# Altium PCB top_pcb_4layers_positive.PcbDoc (part 1 of 2)
Units mil, origin at the board's own origin, x right, y up, seen from the top; angles counter-clockwise.
Board outline 1559.84 x 1559.84 mil, 4 copper layers (Top Layer, GND_positive, Power_positive, Bottom Layer); 135 components, 124 nets, 727 pads, 408 vias.
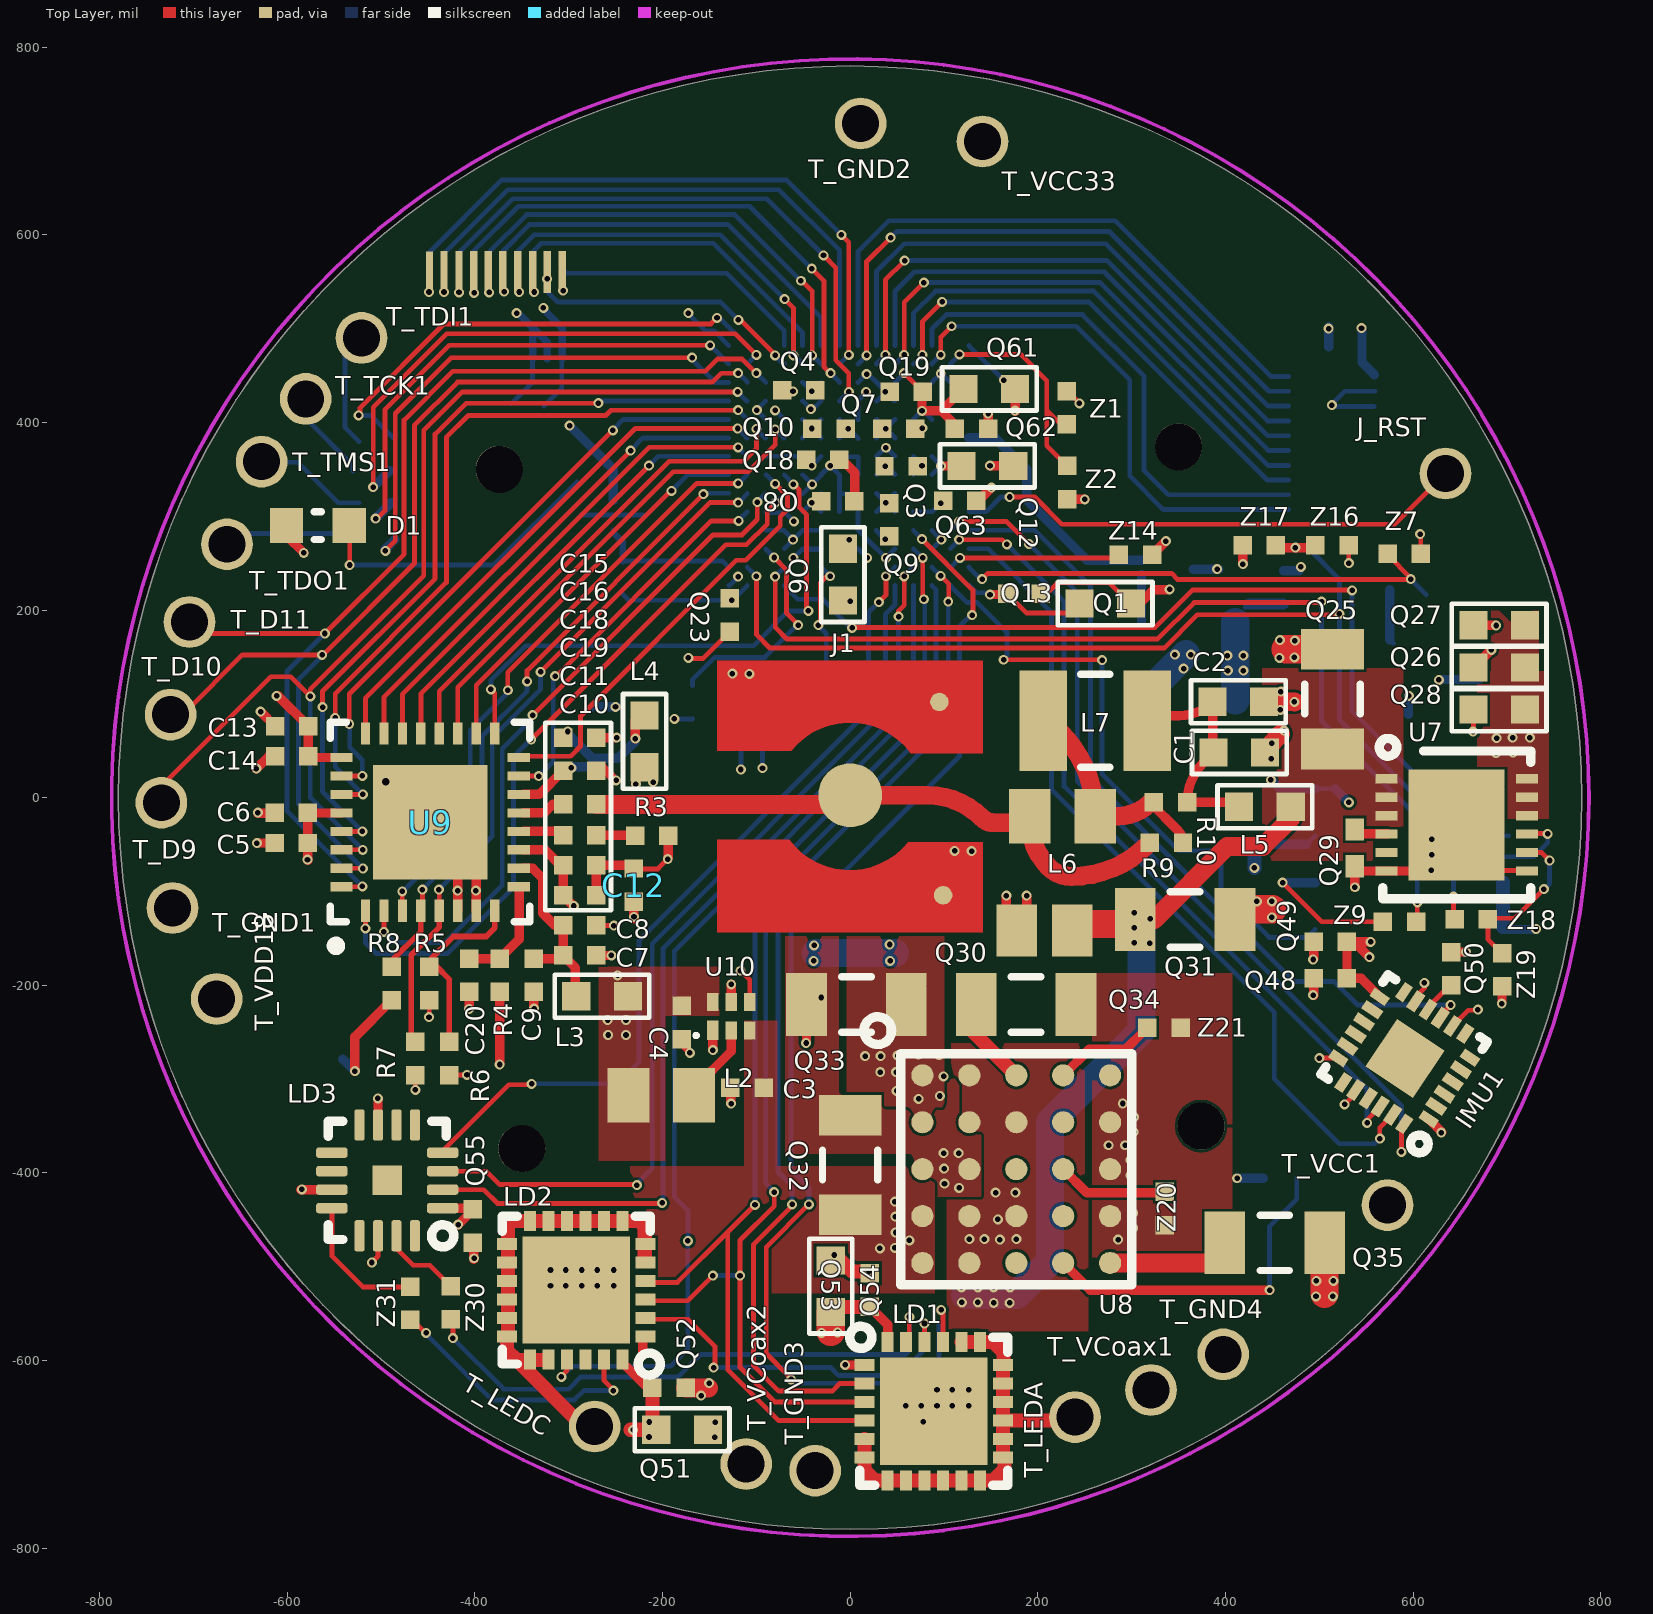
[diagram p0: Top Layer view]
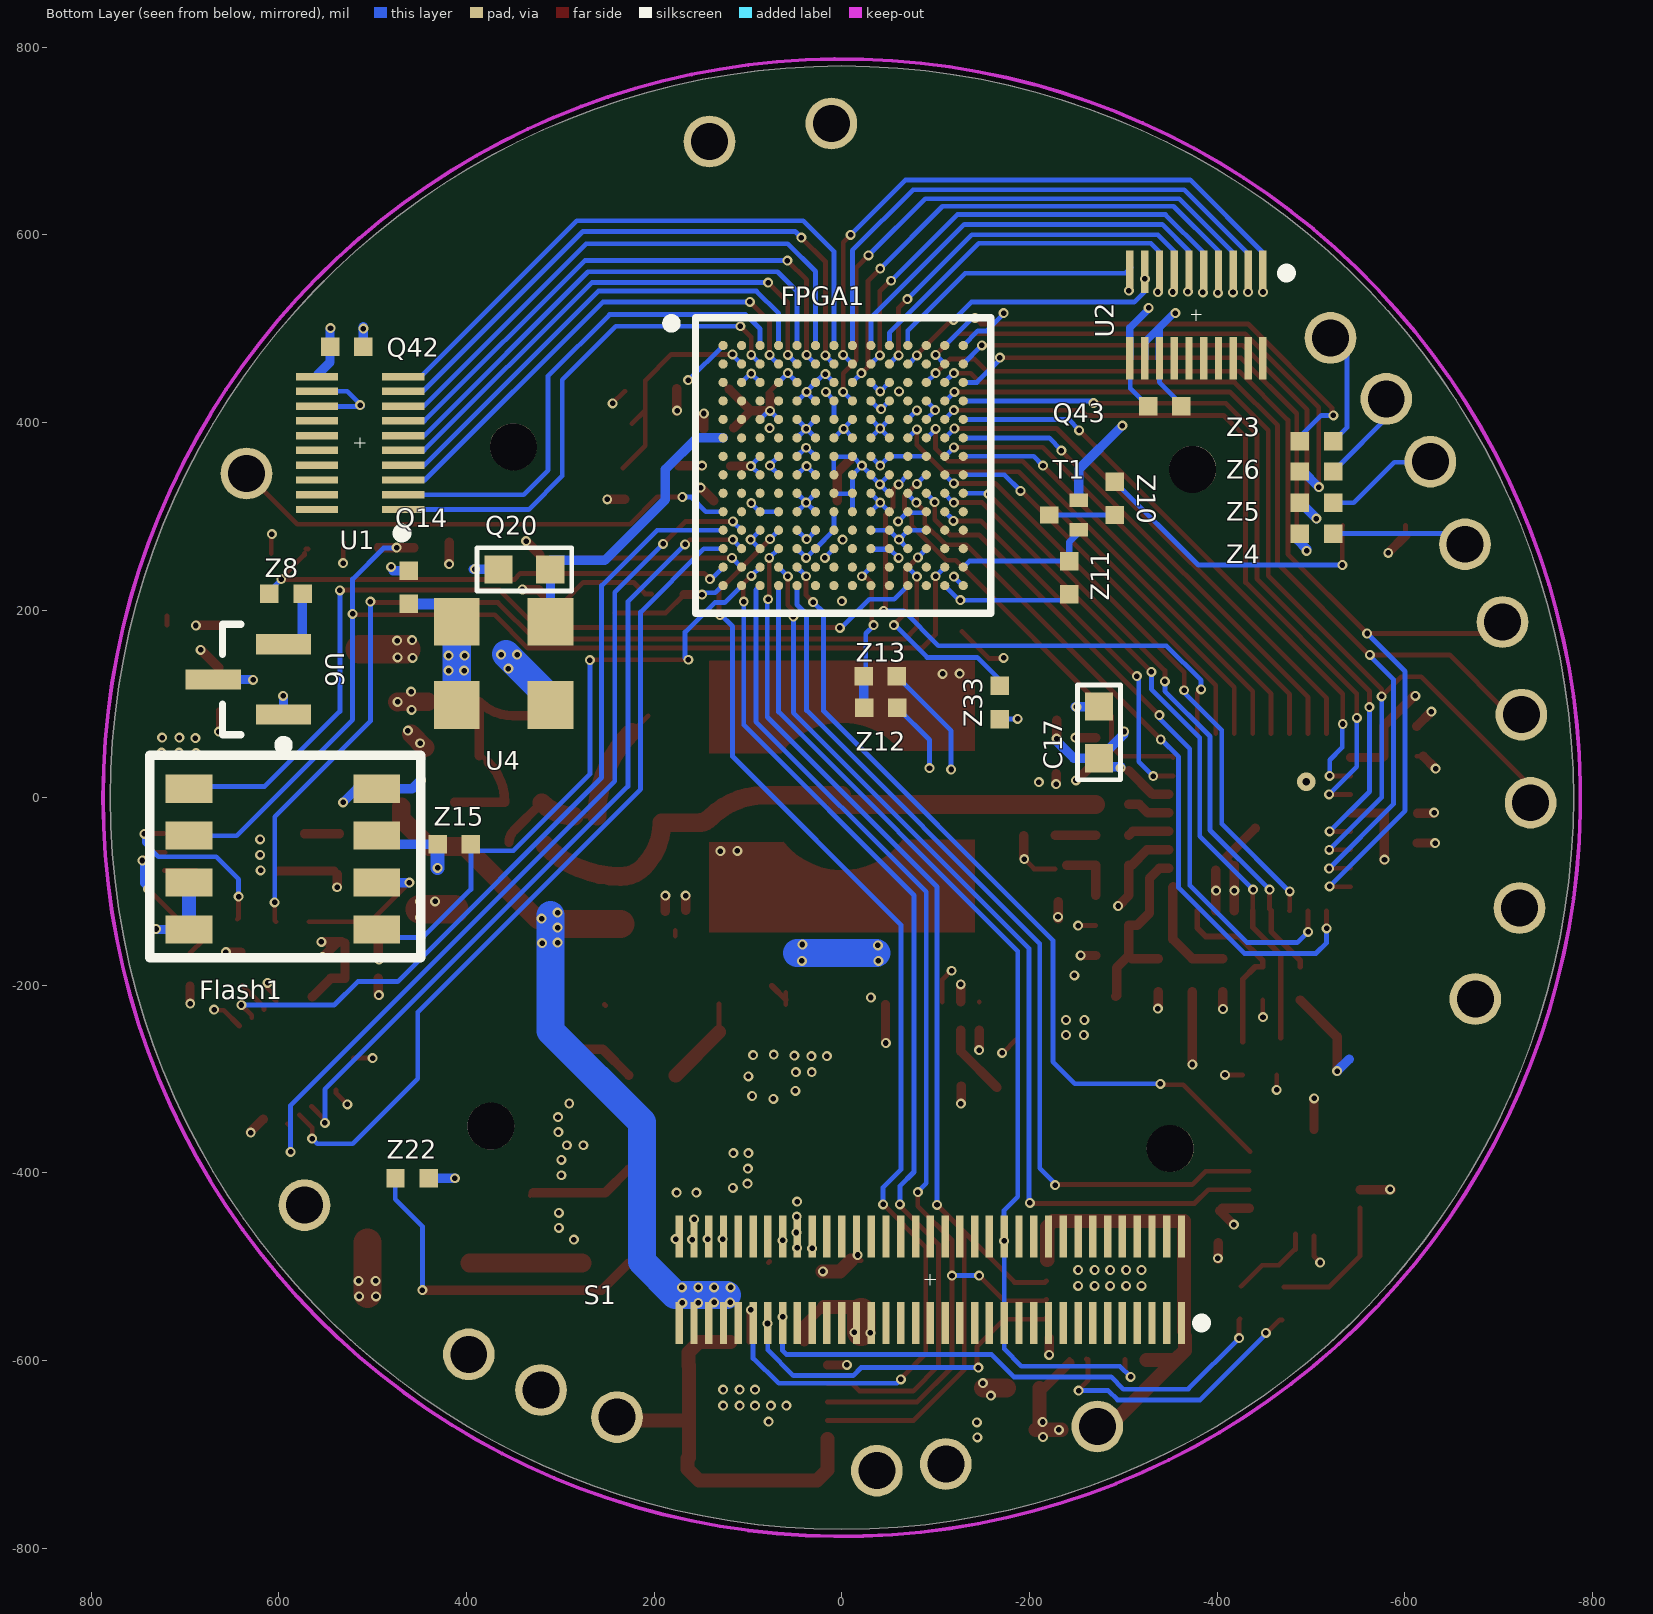
[diagram p1: Bottom Layer view, seen from below]
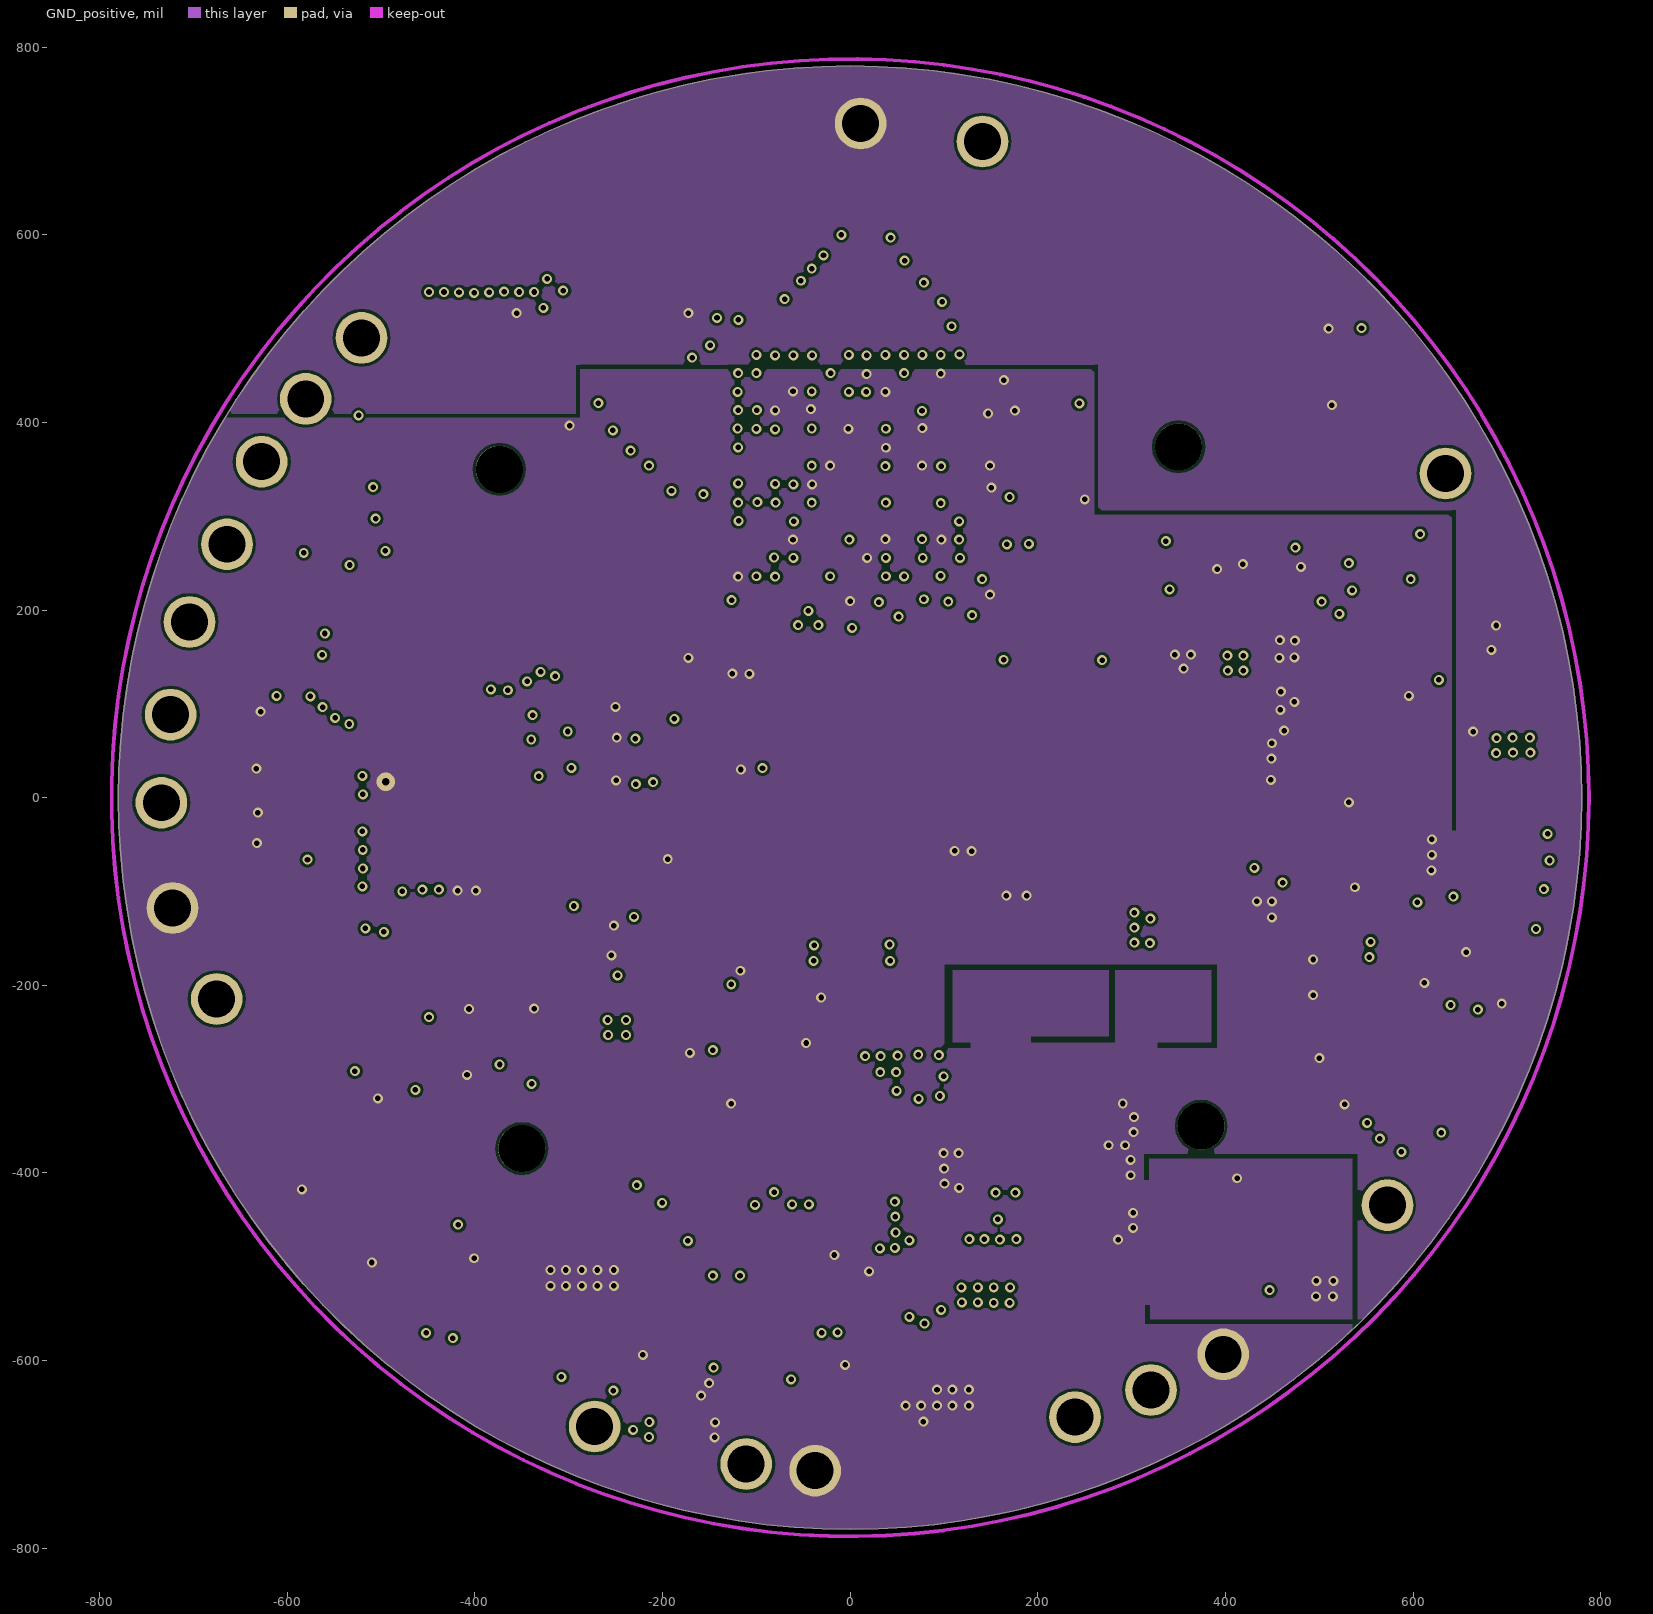
[diagram p2: GND_positive]
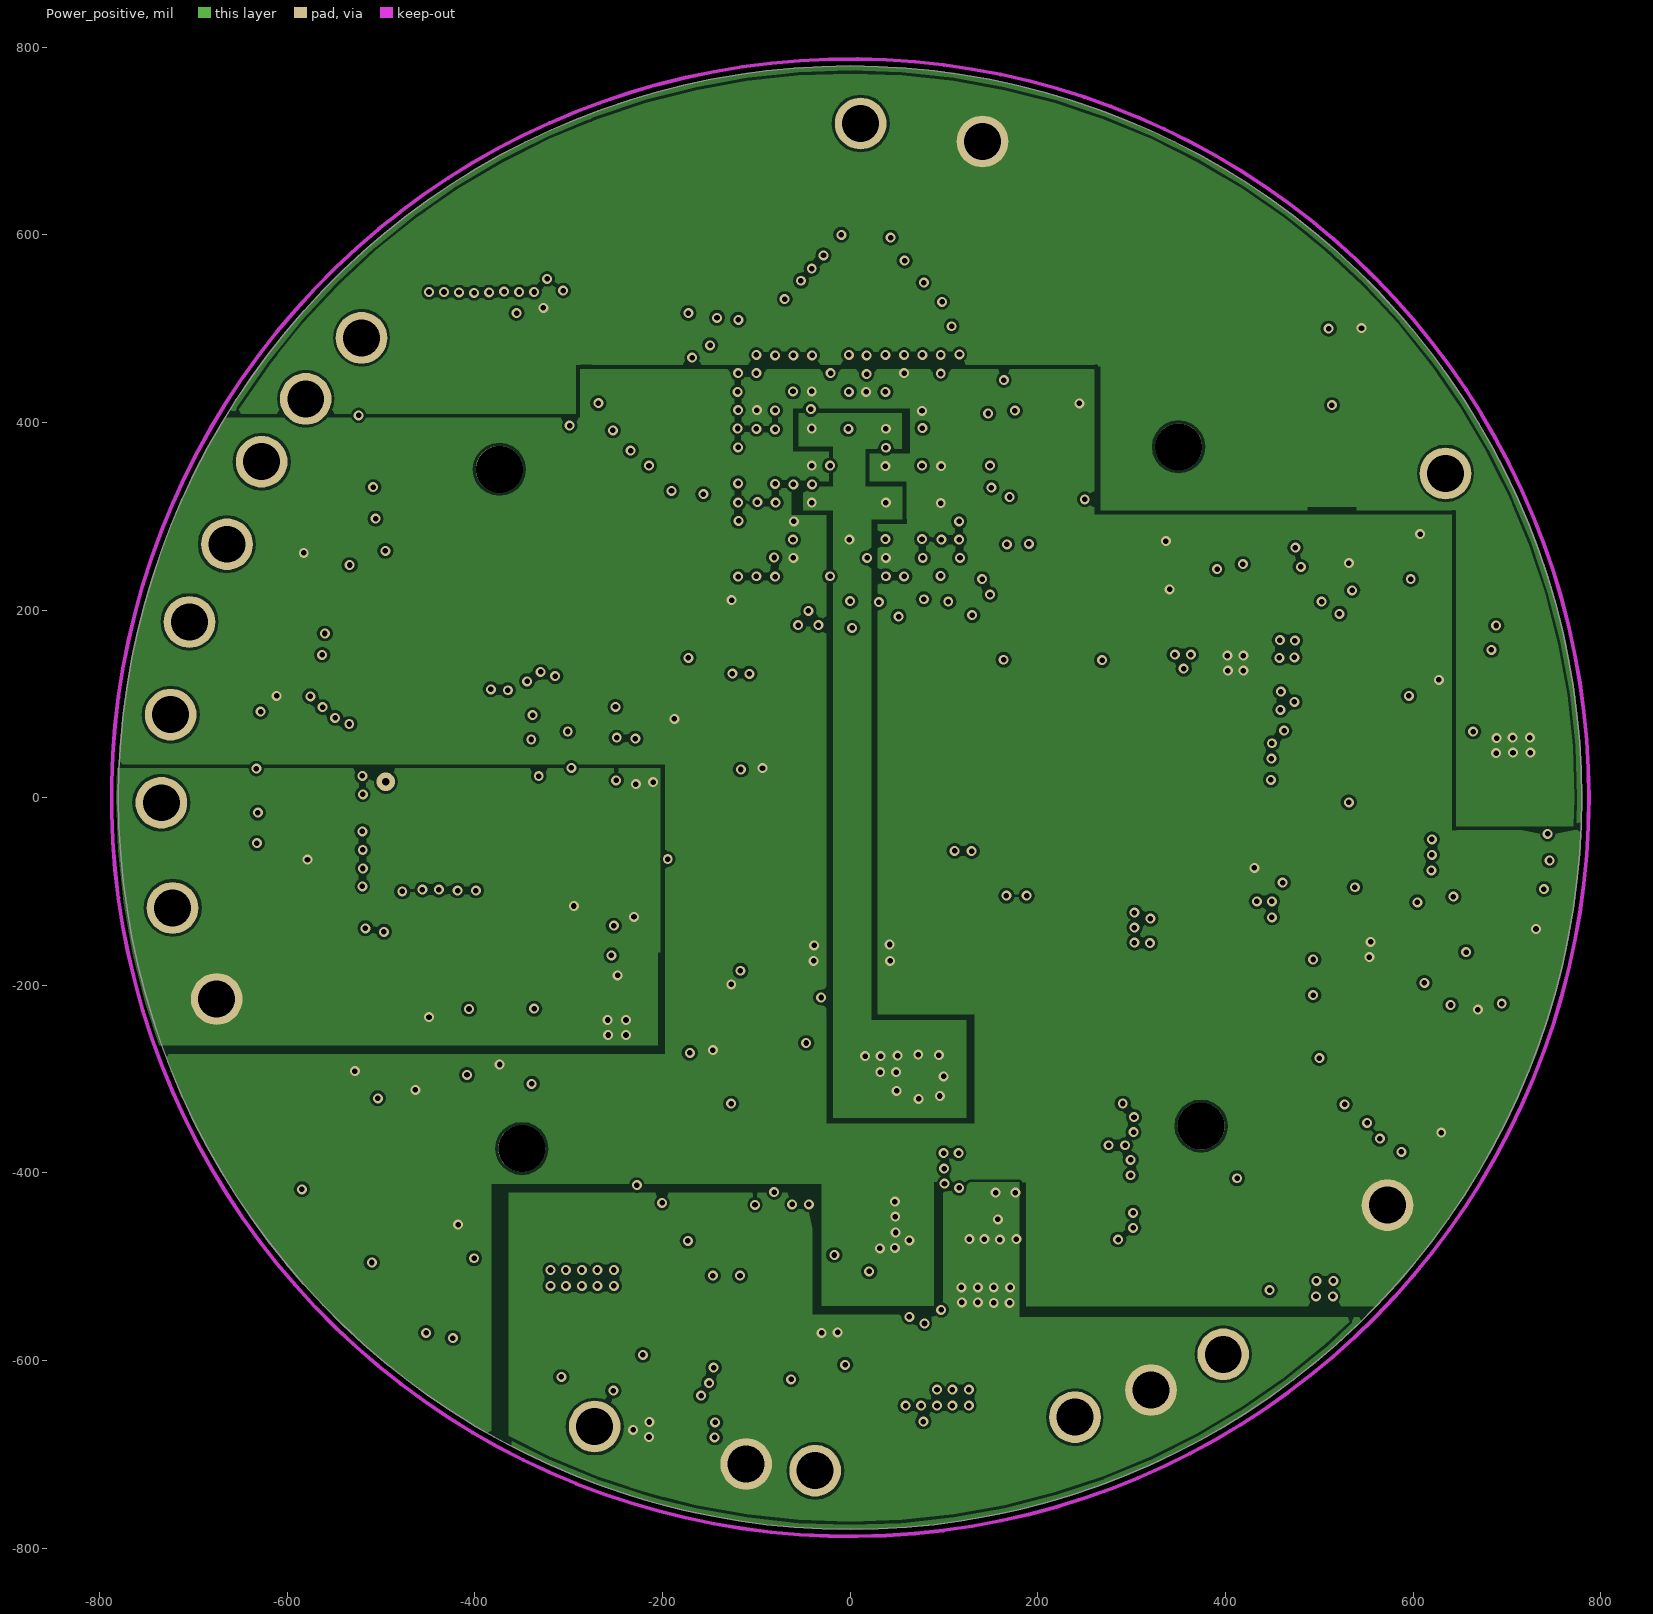
[diagram p3: Power_positive]

## Layer stack, top to bottom
Top Layer: signal copper 1.4
Dielectric: core 12.6, FR-4, Dk 4.8
GND_positive: signal copper 1.4
Dielectric: prepreg 12.6, FR-4, Dk 4.8
Power_positive: signal copper 1.4
Dielectric: core 12.6, FR-4, Dk 4.8
Bottom Layer: signal copper 1.4

## Board outline
-780.04,0 ccw(c-0.12,0) -0.12,-779.93 ccw(c-0.12,0) 779.8,0 ccw(c-0.12,0) -0.12,779.92 ccw(c-0.12,0)

## Design rules (kind name [scope] priority, off if disabled: settings)
Clearance [All] p1: gap=3
ComponentClearance [All] p1: gap=5 collisioncheckmode=3 verticalgap=10 showdistances=FALSE
HoleSize [All] p1: absolutevalues=TRUE maxlimit=255.91 minlimit=5.91 maxpercent=80.000 minpercent=20.000
MinimumAnnularRing [All] p1: minimumring=2.36
MinimumSolderMaskSliver [All] p1: minsoldermaskwidth=0
PlaneClearance [All] p1: clearance=6
PlaneConnect [All] p1: planeconnectstyle=Direct reliefexpansion=20 reliefentries=4 reliefconductorwidth=10 reliefairgap=10
PolygonConnect [All] p1: connectstyle=Direct reliefconductorwidth=10 reliefentries=4 polygonreliefangle="90 Angle" airgapwidth=10
RoutingVias [All] p1: holewidth=10 width=22 viastyle="Through Hole" minholewidth=5.91 minwidth=10.63 maxholewidth=28 maxwidth=50
SilkToSilkClearance [All] p1: silktosilkclearance=0
SilkToSolderMaskClearance [IsPad] p1: minsilkscreentomaskgap=0 clearancetoexposedcopper=FALSE
SolderMaskExpansion SolderMaskExpansion_Via [IsVia And (Not IsTestPoint)] p1: expansion=-19685.04
SolderMaskExpansion [All] p2: expansion=1
Width [All] p1: maxlimit=100 minlimit=3 preferedwidth=10 toplayer_prefwidth=5.12 midlayer1_minwidth=5 midlayer2_minwidth=5 bottomlayer_prefwidth=5.12 minimp=50.000000 maximp=50.000000 favimp=50.000000
21 further rules are at their usual default settings.

## Classes and differential pairs
component class U_led-driver: LD1 LD2 LD3 Q51 Q52 Q53 Q54 Q55 T_GND3 T_GND4 T_LEDA T_LEDC T_VCoax1 T_VCoax2 Z30 Z31
component class U_imu: IMU1 Q48 Q49 Q50
component class U_coaxial-port: C1 C2 J1 L5 L6 L7 R9 R10
component class U_Headstage_withFPGA_BGA: D1 Flash1 FPGA1 J_RST Q1 Q3 Q4 Q6 Q7 Q8 Q9 Q10 Q12 Q13 Q14 Q18 Q19 Q20 Q23 Q42 Q43 Q61 Q62 Q63 S1 T1 T_D9 T_D10 T_D11 T_GND1 T_GND2 T_TCK1 T_TDI1 T_TDO1 T_TMS1 T_VCC1 T_VDD18 U1 U2 U4 U6 Z1 Z2 Z3 Z4 Z5 Z6 Z7 Z8 Z9 Z10 Z11 Z12 Z13 Z14 Z15 Z16 Z17 Z33
component class U_power-supplies: C3 C4 L2 Q25 Q26 Q27 Q28 Q29 Q30 Q31 Q32 Q33 Q34 Q35 T_VCC33 U7 U8 U10 Z18 Z19 Z20 Z21 Z22
component class U_serial-io: C5 C6 C7 C8 C9 C10 C11 C12 C13 C14 C15 C16 C17 C18 C19 C20 L3 L4 R3 R4 R5 R6 R7 R8 U9
net class DIN[0..11]: DIN0 DIN1 DIN2 DIN3 DIN4 DIN5 DIN6 DIN7 DIN8 DIN9 DIN10 DIN11

## Components (designator, comment, footprint, x,y, rotation, side; value= is the part's Value field where it differs from the comment)
C1 "X7R Ceramic" Cap-0603 415.5,46.5 r180 top (schematic designator C14)
C2 "X7R Ceramic" Cap-0603 414.5,100.5 r180 top (schematic designator C15)
C3 "X7R Ceramic" Cap_0402 -115.68,-307.59 r180 top (schematic designator C6)
C4 "X7R Ceramic" Cap_0402 -181.22,-245.38 r270 top (schematic designator C7)
C5 "X7R Ceramic" Cap_0402 -601.5,-46.5 r180 top (schematic designator C43)
C6 "X7R Ceramic" Cap_0402 -601.5,-14.5 r180 top (schematic designator C44)
C7 "X7R Ceramic" Cap_0402 -282.54,-170 r0 top (schematic designator C45)
C8 "X7R Ceramic" Cap_0402 -282.54,-138 r0 top (schematic designator C46)
C9 "X7R Ceramic" Cap_0402 -339,-195 r270 top (schematic designator C47)
C10 "X7R Ceramic" Cap_0402 -282.54,-106 r0 top (schematic designator C48)
C11 "X7R Ceramic" Cap_0402 -282.54,-74 r0 top (schematic designator C49)
C12 "X7R Ceramic" Cap_0402 -229,-87.5 r90 top (schematic designator C50)
C13 "X7R Ceramic" Cap_0402 -601,78 r180 top (schematic designator C51)
C14 "X7R Ceramic" Cap_0402 -601,46 r180 top (schematic designator C52)
C15 "X7R Ceramic" Cap_0402 -282.54,62 r0 top (schematic designator C53)
C16 "X7R Ceramic" Cap_0402 -282.54,27 r0 top (schematic designator C54)
C17 "X7R Ceramic" Cap-0603 -275.88,70.32 r270 bottom (schematic designator C55)
C18 "X7R Ceramic" Cap_0402 -282.54,-9 r0 top (schematic designator C56)
C19 "X7R Ceramic" Cap_0402 -282.54,-42 r0 top (schematic designator C57)
C20 "X7R Ceramic" Cap_0402 -408,-195 r270 top (schematic designator C58)
D1 "GREEN" RES_0603 -567.5,290 r0 top
Flash1 "M25P16" M25P16-S08N 493,-139.5 r90 bottom
FPGA1 "XC6SLX16-2CPG196C" CPG196 -1.5,354 r180 bottom locked
IMU1 "MPU90250" QFN24-3x3mm 590.5,-277.5 r146 top
J1 "Coax Connector" SMA_132134-10-ND 0,0 r270 top locked
J_RST "Header_1PIN" JUMPER1PIN 678.5,290.5 r90 top (schematic designator J_RST1)
L2 "Ferrite Bead" LQM21PN2R2MC0D -210.36,-320.42 r0 top (schematic designator L1)
L3 "Ferrite Bead" BLM18KG601SN1D -288,-218 r0 top (schematic designator L5)
L4 "Ferrite Bead" BLM18KG601SN1D -212.93,36.5 r90 top (schematic designator L6)
L5 "Ferrite Bead" BLM18KG601SN1D 465.5,-3.5 r180 top (schematic designator L2)
L6 "Ferrite Bead" CIG21L4R7MNE 227,-17.5 r0 top (schematic designator L3)
L7 "Ferrite Bead" CBC3225T101MR 259.5,82 r180 top (schematic designator L4)
LD1 "CAT4016" TQFN24-4x4mm 90,-654 r0 top locked
LD2 "CAT4016" TQFN24-4x4mm -293,-525 r180 top (schematic designator LD3)
LD3 "TPL0202-10RUCR" WQFN16-3X3mm -493.5,-408 r180 top locked (schematic designator LD2)
Q1 "X7R Ceramic" Cap-0603 271,208.5 r0 top
Q3 "X7R Ceramic" Cap_0402 60,351.5 r0 top
Q4 "X7R Ceramic" Cap_0402 -60.5,436 r180 top
Q6 "X7R Ceramic" Cap-0603 -9.5,237 r90 top
Q7 "X7R Ceramic" Cap_0402 57.5,391.5 r0 top
Q8 "X7R Ceramic" Cap_0402 -7.5,314 r0 top
Q9 "X7R Ceramic" Cap_0402 40,290.5 r270 top
Q10 "X7R Ceramic" Cap_0402 -17,391.5 r0 top
Q12 "X7R Ceramic" Cap-0603 147,352 r180 top
Q13 "X7R Ceramic" Cap_0402 179.5,219 r180 top
Q14 "X7R Ceramic" Cap_0402 460,230 r90 bottom
Q18 "X7R Ceramic" Cap_0402 -23.5,358.5 r0 top
Q19 "X7R Ceramic" Cap_0402 54,434.5 r180 top
Q20 "X7R Ceramic" Cap-0603 339,245 r180 bottom
Q23 "X7R Ceramic" Cap_0402 -130,189 r270 top
Q25 "25V" C1206 514,105 r270 top (schematic designator C1)
Q26 "Cap Semi" Cap-0603 691,140.5 r0 top (schematic designator C2)
Q27 "Cap Semi" Cap-0603 691,185.5 r0 top (schematic designator C3)
Q28 "Cap Semi" Cap-0603 691,95.5 r0 top (schematic designator C4)
Q29 "" 0402 538,-53.5 r90 top (schematic designator C5)
Q30 "25V, DNP" C0805 207,-141.5 r0 top (schematic designator C8)
Q31 "25V" C1206 357,-130 r180 top (schematic designator C9)
Q32 "16V" C1206 0,-391.5 r270 top (schematic designator C10)
Q33 "16V" C1206 6.5,-220.5 r0 top (schematic designator C11)
Q34 "25V" C1206 187.5,-220.5 r180 top (schematic designator C12)
Q35 "25V" C1206 452.5,-474.5 r180 top (schematic designator C13)
Q42 "X7R Ceramic" Cap_0402 533.5,482.5 r0 bottom (schematic designator C28)
Q43 "X7R Ceramic" Cap_0402 -338.5,419 r0 bottom
Q48 "Cap" Cap_0402 517.5,-194.5 r0 top
Q49 "Cap" Cap_0402 517.5,-155.5 r0 top
Q50 "Cap" Cap_0402 639,-188 r270 top
Q51 "Cap" Cap-0603 -178.5,-675.5 r180 top (schematic designator C38)
Q52 "Cap" Cap_0402 -187.5,-631 r0 top (schematic designator C39)
Q53 "Cap" Cap-0603 -19,-520 r270 top (schematic designator C41)
Q54 "Cap" Cap_0402 22.5,-519 r90 top (schematic designator C42)
Q55 "Cap" Cap_0402 -400.57,-450.9 r90 top (schematic designator C40)
Q61 "X7R Ceramic" Cap-0603 149,434 r180 top (schematic designator C18)
Q62 "X7R Ceramic" Cap_0402 135,391.5 r0 top (schematic designator C17)
Q63 "X7R Ceramic" Cap_0402 122.5,314.5 r0 top (schematic designator C16)
R3 "Res1" Res_0402 -211.5,-40 r180 top (schematic designator R28)
R4 "Res1" Res_0402 -373,-189.27 r90 top (schematic designator R29)
R5 "Res1" Res_0402 -448,-198 r90 top (schematic designator R30)
R6 "Res1" Res_0402 -428,-278 r270 top (schematic designator R31)
R7 "Res1" Res_0402 -463,-278 r90 top (schematic designator R32)
R8 "Res1" Res_0402 -488,-198 r90 top (schematic designator R33)
R9 "Res1" Res_0402 337,-48.5 r0 top (schematic designator R6)
R10 "Res1" Res_0402 341.5,-5.5 r0 top (schematic designator R7)
S1 "Hirose-DF40-70pins" "DF40 - 70" -94.41,-514 r0 bottom locked
T1 "DTC143EE" VMT3 -257,289 r90 bottom
T_D9 "Header_1PIN" JUMPER1PIN -690.38,-60.54 r90 top
T_D10 "Header_1PIN" JUMPER1PIN -680.51,33.37 r90 top
T_D11 "Header_1PIN" JUMPER1PIN -660.41,132.21 r90 top
T_GND1 "Header_1PIN" JUMPER1PIN -678.41,-172.63 r90 top
T_GND2 "Header_1PIN" JUMPER1PIN 55,663.5 r90 top
T_GND3 "Header_1PIN" JUMPER1PIN 6.5,-772.5 r90 top
T_GND4 "Header_1PIN" JUMPER1PIN 441.5,-648.5 r90 top
T_LEDA "Header_1PIN" JUMPER1PIN 283.5,-715.5 r90 top (schematic designator T_LEDA1)
T_LEDC "Header_1PIN" JUMPER1PIN -228.5,-725.5 r90 top (schematic designator T_LEDC1)
T_TCK1 "Header_1PIN" JUMPER1PIN -536.5,370 r90 top
T_TDI1 "Header_1PIN" JUMPER1PIN -477,435 r90 top
T_TDO1 "Header_1PIN" JUMPER1PIN -620.5,215 r90 top
T_TMS1 "Header_1PIN" JUMPER1PIN -583.5,303 r90 top
T_VCC1 "Header_1PIN" JUMPER1PIN 616.5,-489.5 r90 top
T_VCC33 "Header_1PIN" JUMPER1PIN 184.83,644.33 r90 top
T_VCoax1 "Header_1PIN" JUMPER1PIN 364.5,-686.5 r90 top
T_VCoax2 "Header_1PIN" JUMPER1PIN -67,-765.5 r90 top
T_VDD18 "Header_1PIN" JUMPER1PIN -631.38,-269.69 r90 top
U1 "Hirose-DF40C" DF40 513.5,378 r90 bottom locked
U2 "Hirose-DF40C" DF40 -378,514.5 r0 bottom locked
U4 "FXO-HC53100.8" FXO-HC53 410.5,99 r180 bottom
U6 "LM809M3-3.08" SOT23 632.5,126 r0 bottom locked
U7 "LP38798" DFN12 646.5,-29 r0 top (schematic designator U1)
U8 "LTM4622" LGA5x5 177,-396 r0 top locked (schematic designator U3)
U9 "DS90UR913A" WQFN32-DS90UB913A -443,-18 r90 top locked (schematic designator U8)
U10 "TPS62231DRYT" TPS62231DRYT -128.02,-234.11 r0 top (schematic designator U2)
Z1 "Res1" Res_0402 230.19,415.55 r270 top
Z2 "Res1" Res_0402 230.43,336 r270 top
Z3 "Res1" Res_0402 -506,379 r180 bottom
Z4 "Res1" Res_0402 -506,280.5 r180 bottom
Z5 "Res1" Res_0402 -506.06,313.59 r180 bottom
Z6 "Res1" Res_0402 -506,347 r180 bottom
Z7 "Res1" Res_0402 590.51,259.5 r0 top
Z8 "Res1" Res_0402 592.5,218 r0 bottom
Z9 "Res1" Res_0402 585.5,-131.5 r180 top
Z10 "Res1" Res_0402 -290.5,319 r270 bottom
Z11 "Res1" Res_0402 -243,234.5 r90 bottom
Z12 "Res1" Res_0402 -41.5,96.5 r0 bottom (schematic designator R13)
Z13 "Res1" Res_0402 -41,128.5 r180 bottom (schematic designator R16)
Z14 "Res1" Res_0402 304,258 r0 top
Z15 "Res1" Res_0402 413,-50.5 r180 bottom
Z16 "Res1" Res_0402 513.5,269.5 r180 top
Z17 "Res1" Res_0402 436,269.5 r180 top
Z18 "Res1" Res_0402 662,-129 r180 top (schematic designator R1)
Z19 "Res1" Res_0402 695.5,-183.5 r90 top (schematic designator R2)
Z20 "DNP" Res_0402 336,-438 r90 top (schematic designator R3)
Z21 "649k (DNP)" Res_0402 334.5,-244.5 r180 top (schematic designator R4)
Z22 "" Res_0402 458,-405 r0 bottom (schematic designator R5)
Z30 "Res1" Res_0402 -425,-538.5 r90 top (schematic designator R26)
Z31 "Res1" Res_0402 -468.5,-539 r90 top (schematic designator R27)
Z33 "Res1" Res_0402 -167.5,101.5 r270 bottom (schematic designator R14)

## Footprints (in the part's own frame and the unit in brackets; to place one, negate y for a bottom-side part, rotate by r counter-clockwise, add the part's x,y. Pads: shape width x height; smd on the part's side, far side on the other; paste and mask are expansions set on the pad)
0402 [mm] "Chip Capacitor, Body 1.0x0.5mm, IPC High Density"
  rect 0.6x0.5 smd: 1(-0.5,0) 2(0.5,0)
  body extent -0.55,-0.3 0.55,0.3, height 1.3
BLM18KG601SN1D [mil]
  rect 30x30 smd: 1(50.93,6.25) 2(-4.07,6.25)
  silkscreen extent -27,-17 74,29, body extent -8,-9 55,21, height 19
C0805 [mm] "Chip Capacitor, Body 2.0x1.3mm, IPC High Density"
  rect 1.1x1.4 smd: 1(-0.75,0) 2(0.75,0)
  body extent -1.1,-0.72 1.1,0.72, height 1.4
C1206 [mm] "Chip Capacitor, Body 3.2x1.6mm, IPC High Density"
  rect 1.1x1.7 smd: 1(-1.35,0) 2(1.35,0)
  silkscreen extent -0.4,-0.75 0.4,0.75, body extent -1.7,-0.9 1.7,0.9, height 1.3
Cap-0603 [mil] "0603 Capacitor"
  rect 30x30 smd: 1(-26.74,-1.7) 2(28.26,-1.7)
  silkscreen extent -50,-25 51,21, body extent -31,-17 32,13, height 19
Cap_0402 [mm]
  rect 0.5x0.5 smd: 1(0.305,0.046) 2(-0.595,0.046)
  body extent -0.67,-0.23 0.38,0.32, height 0.5
CBC3225T101MR [mm]
  rect 1.29x2.72 smd: 1(1.362,0.003) 2(-1.448,0.003)
  silkscreen extent -0.44,-1.26 0.36,1.26, body extent -1.74,-1.35 1.66,1.35, height 2.7
CIG21L4R7MNE [mm]
  rect 1.13x1.47 smd: 1(-0.905,-0.056) 2(0.865,-0.056)
  body extent -1.12,-0.78 1.08,0.67, height 1.05
CPG196 [mm] "BGA, 196-Leads, Body 8x8mm, Pitch 0.5mm"
  round 0.25 smd: A1(-3.25,3.25) A2(-2.75,3.25) A3(-2.25,3.25) A4(-1.75,3.25) A5(-1.25,3.25) A6(-0.75,3.25) A7(-0.25,3.25) A8(0.25,3.25) A9(0.75,3.25) A10(1.25,3.25) A11(1.75,3.25) A12(2.25,3.25) A13(2.75,3.25) A14(3.25,3.25) B1(-3.25,2.75) B2(-2.75,2.75) B3(-2.25,2.75) B4(-1.75,2.75) B5(-1.25,2.75) B6(-0.75,2.75) B7(-0.25,2.75) B8(0.25,2.75) B9(0.75,2.75) B10(1.25,2.75) B11(1.75,2.75) B12(2.25,2.75) B13(2.75,2.75) B14(3.25,2.75) C1(-3.25,2.25) C2(-2.75,2.25) C3(-2.25,2.25) C4(-1.75,2.25) C5(-1.25,2.25) C6(-0.75,2.25) C7(-0.25,2.25) C8(0.25,2.25) C9(0.75,2.25) C10(1.25,2.25) C11(1.75,2.25) C12(2.25,2.25) C13(2.75,2.25) C14(3.25,2.25) D1(-3.25,1.75) D2(-2.75,1.75) D3(-2.25,1.75) D4(-1.75,1.75) D5(-1.25,1.75) D6(-0.75,1.75) D7(-0.25,1.75) D8(0.25,1.75) D9(0.75,1.75) D10(1.25,1.75) D11(1.75,1.75) D12(2.25,1.75) D13(2.75,1.75) D14(3.25,1.75) E1(-3.25,1.25) E2(-2.75,1.25) E3(-2.25,1.25) E4(-1.75,1.25) E5(-1.25,1.25) E6(-0.75,1.25) E7(-0.25,1.25) E8(0.25,1.25) E9(0.75,1.25) E10(1.25,1.25) E11(1.75,1.25) E12(2.25,1.25) E13(2.75,1.25) E14(3.25,1.25) F1(-3.25,0.75) F2(-2.75,0.75) F3(-2.25,0.75) F4(-1.75,0.75) F5(-1.25,0.75) F6(-0.75,0.75) F7(-0.25,0.75) F8(0.25,0.75) F9(0.75,0.75) F10(1.25,0.75) F11(1.75,0.75) F12(2.25,0.75) F13(2.75,0.75) F14(3.25,0.75) G1(-3.25,0.25) G2(-2.75,0.25) G3(-2.25,0.25) G4(-1.75,0.25) G5(-1.25,0.25) G6(-0.75,0.25) G7(-0.25,0.25) G8(0.25,0.25) G9(0.75,0.25) G10(1.25,0.25) G11(1.75,0.25) G12(2.25,0.25) G13(2.75,0.25) G14(3.25,0.25) H1(-3.25,-0.25) H2(-2.75,-0.25) H3(-2.25,-0.25) H4(-1.75,-0.25) H5(-1.25,-0.25) H6(-0.75,-0.25) H7(-0.25,-0.25) H8(0.25,-0.25) H9(0.75,-0.25) H10(1.25,-0.25) H11(1.75,-0.25) H12(2.25,-0.25) H13(2.75,-0.25) H14(3.25,-0.25) J1(-3.25,-0.75) J2(-2.75,-0.75) J3(-2.25,-0.75) J4(-1.75,-0.75) J5(-1.25,-0.75) J6(-0.75,-0.75) J7(-0.25,-0.75) J8(0.25,-0.75) J9(0.75,-0.75) J10(1.25,-0.75) J11(1.75,-0.75) J12(2.25,-0.75) J13(2.75,-0.75) J14(3.25,-0.75) K1(-3.25,-1.25) K2(-2.75,-1.25) K3(-2.25,-1.25) K4(-1.75,-1.25) K5(-1.25,-1.25) K6(-0.75,-1.25) K7(-0.25,-1.25) K8(0.25,-1.25) K9(0.75,-1.25) K10(1.25,-1.25) K11(1.75,-1.25) K12(2.25,-1.25) K13(2.75,-1.25) K14(3.25,-1.25) L1(-3.25,-1.75) L2(-2.75,-1.75) L3(-2.25,-1.75) L4(-1.75,-1.75) L5(-1.25,-1.75) L6(-0.75,-1.75) L7(-0.25,-1.75) L8(0.25,-1.75) L9(0.75,-1.75) L10(1.25,-1.75) L11(1.75,-1.75) L12(2.25,-1.75) L13(2.75,-1.75) L14(3.25,-1.75) M1(-3.25,-2.25) M2(-2.75,-2.25) M3(-2.25,-2.25) M4(-1.75,-2.25) M5(-1.25,-2.25) M6(-0.75,-2.25) M7(-0.25,-2.25) M8(0.25,-2.25) M9(0.75,-2.25) M10(1.25,-2.25) M11(1.75,-2.25) M12(2.25,-2.25) M13(2.75,-2.25) M14(3.25,-2.25) N1(-3.25,-2.75) N2(-2.75,-2.75) N3(-2.25,-2.75) N4(-1.75,-2.75) N5(-1.25,-2.75) N6(-0.75,-2.75) N7(-0.25,-2.75) N8(0.25,-2.75) N9(0.75,-2.75) N10(1.25,-2.75) N11(1.75,-2.75) N12(2.25,-2.75) N13(2.75,-2.75) N14(3.25,-2.75) P1(-3.25,-3.25) P2(-2.75,-3.25) P3(-2.25,-3.25) P4(-1.75,-3.25) P5(-1.25,-3.25) P6(-0.75,-3.25) P7(-0.25,-3.25) P8(0.25,-3.25) P9(0.75,-3.25) P10(1.25,-3.25) P11(1.75,-3.25) P12(2.25,-3.25) P13(2.75,-3.25) P14(3.25,-3.25)
  silkscreen extent -4.78,-4 4,4, body extent -4,-4 4,4, height 1.1
DF40 [mm]
  rect 0.2x1.14 smd mask+0.05: 1(-1.8,1.17) 2(-1.4,1.17) 3(-1,1.17) 4(-0.6,1.17) 5(-0.2,1.17) 6(0.2,1.17) 7(0.6,1.17) 8(1,1.17) 9(1.4,1.17) 10(1.8,1.17) 11(1.8,-1.17) 12(1.4,-1.17) 13(1,-1.17) 14(0.6,-1.17) 15(0.2,-1.17) 16(-0.2,-1.17) 17(-0.6,-1.17) 18(-1,-1.17) 19(-1.4,-1.17) 20(-1.8,-1.17)
  silkscreen extent -2.44,-1.13 0.14,0.15
"DF40 - 70" [mm]
  rect 0.2x1.14 smd mask+0.05: 1(-6.8,1.17) 2(-6.4,1.17) 3(-6,1.17) 4(-5.6,1.17) 5(-5.2,1.17) 6(-4.8,1.17) 7(-4.4,1.17) 8(-4,1.17) 9(-3.6,1.17) 10(-3.2,1.17) 11(-2.8,1.17) 12(-2.4,1.17) 13(-2,1.17) 14(-1.6,1.17) 15(-1.2,1.17) 16(-0.8,1.17) 17(-0.4,1.17) 18(0,1.17) 19(0.4,1.17) 20(0.8,1.17) 21(1.2,1.17) 22(1.6,1.17) 23(2,1.17) 24(2.4,1.17) 25(2.8,1.17) 26(3.2,1.17) 27(3.6,1.17) 28(4,1.17) 29(4.4,1.17) 30(4.8,1.17) 31(5.2,1.17) 32(5.6,1.17) 33(6,1.17) 34(6.4,1.17) 35(6.8,1.17) 36(6.8,-1.17) 37(6.4,-1.17) 38(6,-1.17) 39(5.6,-1.17) 40(5.2,-1.17) 41(4.8,-1.17) 42(4.4,-1.17) 43(4,-1.17) 44(3.6,-1.17) 45(3.2,-1.17) 46(2.8,-1.17) 47(2.4,-1.17) 48(2,-1.17) 49(1.6,-1.17) 50(1.2,-1.17) 51(0.8,-1.17) 52(0.4,-1.17) 53(0,-1.17) 54(-0.4,-1.17) 55(-0.8,-1.17) 56(-1.2,-1.17) 57(-1.6,-1.17) 58(-2,-1.17) 59(-2.4,-1.17) 60(-2.8,-1.17) 61(-3.2,-1.17) 62(-3.6,-1.17) 63(-4,-1.17) 64(-4.4,-1.17) 65(-4.8,-1.17) 66(-5.2,-1.17) 67(-5.6,-1.17) 68(-6,-1.17) 69(-6.4,-1.17) 70(-6.8,-1.17)
  silkscreen extent -7.35,-0.15 0.15,1.17
DFN12 [mm]
  rect 0.6x0.25 smd: 1(-1.9,1.25) 2(-1.9,0.75) 3(-1.9,0.25) 4(-1.9,-0.25) 5(-1.9,-0.75) 6(-1.9,-1.25) 7(1.9,-1.25) 8(1.9,-0.75) 9(1.9,-0.25) 10(1.9,0.25) 11(1.9,0.75) 12(1.9,1.25)
  rect 2.6x3 smd: 13(0,0)
  silkscreen extent -2.1,-2 2,2.34
FXO-HC53 [mm]
  rect 1.24x1.29 smd: 1(0,-0.005) 2(2.54,-0.005) 3(2.54,2.245) 4(0,2.245)
JUMPER1PIN [mm]
  round 1.4 hole 1: 0(1.4,1.115)
LGA5x5 [mm] "LGA Package  25-Lead (6.25mm × 6.25mm × 1.82mm)"
  round 0.6 smd: A1(-2.54,2.54) A2(-1.27,2.54) A3(0,2.54) A4(1.27,2.54) A5(2.54,2.54) B1(-2.54,1.27) B2(-1.27,1.27) B3(0,1.27) B4(1.27,1.27) B5(2.54,1.27) C1(-2.54,0) C2(-1.27,0) C3(0,0) C4(1.27,0) C5(2.54,0) D1(-2.54,-1.27) D2(-1.27,-1.27) D3(0,-1.27) D4(1.27,-1.27) D5(2.54,-1.27) E1(-2.54,-2.54) E2(-1.27,-2.54) E3(0,-2.54) E4(1.27,-2.54) E5(2.54,-2.54)
  silkscreen extent -4.12,-3.13 3.13,4.12, body extent -3.13,-3.13 3.13,3.13, height 1.82
LQM21PN2R2MC0D [mm]
  rect 1.13x1.47 smd: 1(1.111,0.08) 2(-0.659,0.08)
  body extent -0.87,-0.64 1.33,0.81, height 1.05
M25P16-S08N [mil]
  rect 30x50 smd: 1(-1,2.68) 2(49,2.68) 3(99,2.68) 4(149,2.68) 5(149,202.68) 6(99,202.68) 7(49,202.68) 8(-1,202.68)
  silkscreen extent -31,-44 185,245
QFN24-3x3mm [mm] "QFN24 3x3mm"
  rect 0.5x0.27 smd: 1(-1.475,1) 6(-1.475,-1) 13(1.475,-1) 18(1.475,1)
  rect 0.55x0.27 smd: 2(-1.45,0.6) 3(-1.45,0.2) 4(-1.45,-0.2) 5(-1.45,-0.6) 14(1.449,-0.6) 15(1.449,-0.2) 16(1.449,0.2) 17(1.45,0.6)
  rect 0.27x0.5 smd: 7(-1,-1.475) 12(1,-1.475) 19(1,1.475) 24(-1,1.475)
  rect 0.27x0.55 smd: 8(-0.6,-1.45) 9(-0.2,-1.45) 10(0.2,-1.45) 11(0.6,-1.45) 20(0.6,1.449) 21(0.2,1.449) 22(-0.2,1.449) 23(-0.6,1.45)
  rect 1.54x1.54 smd: PAD(-0.025,0)
  silkscreen extent -1.88,-1.63 1.63,1.94, body extent -1.5,-1.5 1.5,1.5, height 1
Res_0402 [mm]
  rect 0.5x0.5 smd: 1(0.45,0.017) 2(-0.45,0.017)
  body extent -0.53,-0.26 0.52,0.29, height 0.5
RES_0603 [mm]
  rect 0.9x0.95 smd: 1(-0.85,0) 2(0.85,0)
  silkscreen extent -0.1,-0.38 0.1,0.38, body extent -0.85,-0.45 0.85,0.45, height 0.55
SMA_132134-10-ND [mm]
  round 1.73 smd: 0(-0.065,0)
  round 0.5 smd: 1(-2.591,2.413) 1(2.642,2.515)
  Top Layer region: -3.708,-3.607 -1.27,-3.607 -1.27,-1.6 -1.266,-1.595 -1.839,-0.871 -2.032,0.033 -1.807,0.928 -1.209,1.632 -1.209,1.632 -1.209,3.592 -3.698,3.592 -3.708,3.581
  Top Layer region: 3.64,3.592 1.201,3.592 1.201,1.585 1.197,1.58 1.77,0.855 1.963,-0.048 1.738,-0.943 1.14,-1.647 1.14,-1.647 1.14,-3.607 3.629,-3.607 3.64,-3.597
SOT23 [mm] "SOT23, 3-Leads, Body 2.90x2.45mm, Pitch 0.95mm, IPC Medium Density"
  rect 1.5x0.55 smd: 1(-0.95,0.95) 2(-0.95,-0.95) 3(0.95,0)
  silkscreen extent -1.07,-1.5 0.7,1.9, body extent -0.7,-1.5 0.7,1.5, height 1.1
TPS62231DRYT [mm]
  rect 0.3x0.52 smd paste+0 mask+0.05: 1(-0.469,-0.353)
  rect 0.3x0.49 smd paste+0 mask+0.05: 2(0.031,-0.353) 3(0.531,-0.353) 4(0.531,0.417) 5(0.031,0.417) 6(-0.469,0.417)
  silkscreen extent -0.97,-0.54 -0.87,-0.44, body extent -0.72,-0.49 0.78,0.56, height 0.6
TQFN24-4x4mm [mm] "TQFN24, 4x4mm AR"
  rect 0.55x0.32 smd: 1(-1.9,1.25) 2(-1.9,0.75) 3(-1.9,0.25) 4(-1.9,-0.25) 5(-1.9,-0.75) 6(-1.9,-1.25) 13(1.85,-1.25) 14(1.85,-0.75) 15(1.85,-0.25) 16(1.85,0.25) 17(1.85,0.75) 18(1.85,1.25)
  rect 0.32x0.55 smd: 7(-1.275,-1.875) 8(-0.775,-1.875) 9(-0.275,-1.875) 10(0.225,-1.875) 11(0.725,-1.875) 12(1.225,-1.875) 19(1.225,1.875) 20(0.725,1.875) 21(0.225,1.875) 22(-0.275,1.875) 23(-0.775,1.875) 24(-1.275,1.875)
  rect 2.9x2.9 smd: PAD(-0.025,0)
  silkscreen extent -2.3,-2 1.98,2.3, body extent -2,-2 2,2, height 1
VMT3 [mm]
  rect 0.37x0.5 smd: 1(-0.089,0.116) 2(0.711,0.116)
  rect 0.47x0.5 smd: 3(0.311,0.916)
WQFN16-3X3mm [mm] "WQFN16 3X3mm"
  rrect50% 0.85x0.28 smd: 1(-1.5,0.75) 2(-1.5,0.25) 3(-1.5,-0.25) 4(-1.5,-0.75) 9(1.5,-0.75) 10(1.5,-0.25) 11(1.5,0.25) 12(1.5,0.75)
  rrect50% 0.28x0.85 smd: 5(-0.75,-1.5) 6(-0.25,-1.5) 7(0.25,-1.5) 8(0.75,-1.5) 13(0.75,1.5) 14(0.25,1.5) 15(-0.25,1.5) 16(-0.75,1.5)
  rect 0.8x0.8 smd: PAD(0,0)
  silkscreen extent -1.8,-1.6 1.6,1.8, body extent -1.6,-1.6 1.6,1.6, height 0.8
WQFN32-DS90UB913A [mm]
  rect 0.6x0.25 smd mask+0: 1(-2.605,1.873) 2(-2.605,1.373) 3(-2.605,0.873) 4(-2.605,0.373) 5(-2.605,-0.127) 6(-2.605,-0.627) 7(-2.605,-1.127) 8(-2.605,-1.627) 17(2.195,-1.627) 18(2.195,-1.127) 19(2.195,-0.627) 20(2.195,-0.127) 21(2.195,0.373) 22(2.195,0.873) 23(2.195,1.373) 24(2.195,1.873)
  rect 0.25x0.6 smd mask+0: 9(-1.955,-2.277) 10(-1.455,-2.277) 11(-0.955,-2.277) 12(-0.455,-2.277) 13(0.045,-2.277) 14(0.545,-2.277) 15(1.045,-2.277) 16(1.545,-2.277) 25(1.545,2.523) 26(1.045,2.523) 27(0.545,2.523) 28(0.045,2.523) 29(-0.455,2.523) 30(-0.955,2.523) 31(-1.455,2.523) 32(-1.955,2.523)
  rect 3.1x3.1 smd paste-4: 33(-0.205,0.123)
  silkscreen extent -3.68,-2.58 2.49,2.82, body extent -2.76,-2.43 2.34,2.67, height 0.8

## Part data
C1 C2 C3 C4 C5 C6 C7 C8 C9 C10 C11 C12 C13 C14 C15 C16 C17 C18 C19 C20 Q1 Q3 Q4 Q6 Q7 Q8 Q9 Q10 Q12 Q13 Q14 Q18 Q19 Q20 Q23 Q42 Q43 Q61 Q62 Q63: library part Cap, "Capacitor"
D1: library part LED3, "Typical BLUE SiC LED"
FPGA1: "Spartan-6 LX 1.2V FPGA, 106 User I/Os, 196-Ball Chip-Scale BGA (0.5mm Pitch), Speed Grade 2, Commercial Grade, Pb-Free"
IMU1: "9-Axis IMU (Accel, Gyro, Magno)"
LD1 LD2: "16-Channel Constant Current LED Driver"
LD3: "256 Tap, Dual Channel Digital Potentiometer with SPI Interface and Non-Volatile Memory, -40 to 85 degC, 14-pin QFN (RUC14)"
Q25 Q29 Q31 Q32 Q33 Q34 Q35: library part "Cap Semi", "Capacitor (Semiconductor SIM Model)"
Q26 Q27 Q28: "Capacitor (Semiconductor SIM Model)"
Q30: library part "Cap Pol3", "Polarized Capacitor (Surface Mount)"
Q48 Q49 Q50 Q51 Q52 Q53 Q54 Q55: "Capacitor"
R3 R4 R5 R6 R7 R8 R9 R10 Z1 Z2 Z3 Z4 Z5 Z6 Z7 Z8 Z9 Z10 Z11 Z12 Z13 Z14 Z15 Z16 Z17 Z18 Z19 Z30 Z31 Z33: "Resistor"
U7: library part Component_1, "Low Noise Positive LDO"
U9: "DS90UR913ASERIALIZER"
U10: "Buck Step Down Regulator with 2.05 to 6 V Input and 1.8 V Output, -40 to 85 degC, 6-Pin SON (DRY), Green (RoHS & no Sb/Br)"
Z20 Z21 Z22: library part Res1, "Resistor"

## Free pads (board coordinates)
  rect 7.87x44.88 smd: 0(-448.5,560) 0(-433,560.5) 0(-417,560.5) 0(-401.5,560.5) 0(-386,560.5) 0(-370.5,560.5) 0(-354.5,560.5) 0(-338.5,560.5) 0(-323,560.5) 0(-307,560.5)
  round 50 hole 50: 0(-374,350) 0(-350,-374) 0(350,374) 0(374,-350)

## Via types
v1: diameter 10.63, hole 5.91, Top Layer to Bottom Layer, 324 vias
v2: diameter 10.63, hole 5.91, Top Layer to Bottom Layer, tented bottom, 83 vias
v3: diameter 19.68, hole 7.87, Top Layer to Bottom Layer, tented both sides, 1 vias

## Nets (pads, with @x,y where several pads share a name; then routed paths per layer and width w, separated by ;. In a path a pad name is that pad's centre, name@x,y a point inside that pad or via, vN(x,y) a via of type N, cw(c..) or ccw(c..) an arc to the next point about the centre after c; other vN are vias at no path point)
+VCOAX_5.5V: L5.2 LD1.24 LD2.24 Q25.2 Q30.2 Q31.2 Q51.2 Q52.2 Q53.2 Q54.2 S1.22 S1.23 S1.31 S1.32 S1.33 S1.34 S1.35 S1.36 S1.37 S1.38 S1.39 T_VCoax1.0 T_VCoax2.0 U7.1 U7.2 U7.3 U8.A2 U8.B2 U8.B3 U8.D2 U8.D3 U8.E2 | length 1038.4
  Top Layer w5.12: LD2.24@-242.82,-602.31 LD2.24@-242.82,-598.82 ; Q53.2@-21,-542 Q53.2@-20.56,-542.44 ; Q54.2@17.74,-548.26 Q54.2@19.5,-546.5 ; Q31.2@299.35,-134.5 Q31.2@303.85,-130 Q31.2@324,-130
  Top Layer w10: LD2.24@-242.82,-602.31 Q52.2@-209.94,-635.18 ; Q54.2@20.68,-542.44 39.82,-561.58 LD1.24@39.82,-580.18
  Top Layer w15: v1@-234.2,-673.8 Q51.2@-206.76,-673.8 ; Q51.2@-210.94,-670.56 Q52.2@-210.94,-629.18 ; Q53.2@-20.7,-548.26 -15.44,-543 Q54.2@19,-543
  Top Layer w20: Q31.2@324,-130 402,-52 440,-52 469.57,-22.43 L5.2@469.57,-9.75
  Top Layer w30: -20.7,-569.5 Q53.2@-20.7,-548.26 ; Q30.2@236.03,-134.5 Q31.2@299.35,-134.5
  Bottom Layer w30: 122.5,-530 177.5,-530 213,-494.5 213,-346 310.5,-248.5 310.5,-125
  other v1: -214.5,-681.5 -231.5,-674 -214,-665.5 -30.5,-570.5 -13.5,-570 119,-538 136,-538 153,-538.5 170,-538.5 118.5,-522 136,-522 153,-522 170.5,-522 159.5,-471 127,-470.5 143,-470.5 177,-470.5 157.5,-449.5 155,-421 176,-421 319.5,-155 303,-154.5 303,-138.5 320,-129 303,-122.5
AUXIN1_HSA_A: U1.1
AUXIN1_HSA_B: U1.5
AUXIN1_HSB_A: U2.1
AUXIN1_HSB_B: U2.5
AUXIN2_HSA_A: U1.2
AUXIN2_HSA_B: U1.6
AUXIN2_HSB_A: U2.2
AUXIN2_HSB_B: U2.6
AUXIN3_HSA_A: U1.3
AUXIN3_HSA_B: U1.7
AUXIN3_HSB_A: U2.3
AUXIN3_HSB_B: U2.7
AUXOUT_HSA_B: U1.4
AUXOUT_HSB_B: U2.4
C\S\_A+: FPGA1.B7 U1.12 | length 646.1
  Top Layer w5.12: v2(17.5,471.5) 17.5,571.5 v2(43,597)
  Bottom Layer w5.12: FPGA1.B7@8.34,462.27 17,470.93 v2@17,471 ; v2(43,597) 49.5,603.5 276,603.5 446.38,433.12 U1.12@467.44,433.12
C\S\_A-: FPGA1.A7 U1.11 | length 641.8
  Bottom Layer w5.12: FPGA1.A7@8.34,481.95 8.34,582.34 41,615 282.5,615 448.63,448.87 U1.11@467.44,448.87
C\S\_B+: FPGA1.B11 pad.0@-323,560.5 U2.12 | length 306.4
  Top Layer w5.12: v2(-119.3,509.41) -117.41,509.41 -80.5,472.5 v2@-80.5,470.5
  Bottom Layer w5.12: U2.12@-322.88,560.06 -322.88,539.44 -311.71,528.28 -138.17,528.28 v2(-119.3,509.41) ; v2@-80,471 FPGA1.B11@-71.27,462.27
  Bottom Layer w6: v2@-80,471 v2(-80,471.5) ; FPGA1.B11@-71.27,462.27 FPGA1.B11@-70.4,462.27
  other v1: -323,553
C\S\_B-: FPGA1.A11 pad.0@-307,560.5 U2.11 | length 281.9
  Bottom Layer w5.12: U2.11@-308.46,565.18 -302.27,558.98 -131.48,558.98 -70.4,497.9 FPGA1.A11@-70.4,481.95
  other v1: -306,540.5
DIN0: FPGA1.F11 U9.19 | length 524.4
  Top Layer w5.12: U9.19@-418.31,68.4 -418.31,117.69 -188.5,347.5 -108.5,347.5 -80,376 v2(-80,392.5)
  Bottom Layer w5.12: v2(-80,392.5) -71.03,383.53 FPGA1.F11@-70.4,383.53
DIN1: FPGA1.F12 U9.20 | length 524.1
  Top Layer w5.12: U9.20@-437.99,68.4 -437.99,113.51 -193,358.5 -113.5,358.5 -100,372 v2(-100,393)
  Bottom Layer w5.12: v2@-99.5,392 -91.03,383.53 FPGA1.F12@-90.08,383.53
DIN2: FPGA1.G14 U9.21 | length 475.4
  Top Layer w5.12: U9.21@-457.68,68.4 -457.68,110.82 v2(-214.5,354)
  Bottom Layer w5.12: v2(-214.5,354) -204.66,363.84 FPGA1.G14@-129.45,363.84
DIN3: FPGA1.G13 U9.22 | length 522.2
  Top Layer w5.12: U9.22@-477.36,68.4 -477.36,110.14 -214,373.5 v2(-119.5,373.5)
  Bottom Layer w5.12: v2@-119.5,373 -110.34,363.84 FPGA1.G13@-109.77,363.84
DIN4: FPGA1.F14 U9.23 | length 520.5
  Top Layer w5.12: U9.23@-497.05,68.4 -497.05,106.95 v2(-234,370)
  Bottom Layer w5.12: v2@-234,370.5 -220.97,383.53 FPGA1.F14@-129.45,383.53
DIN5: FPGA1.F13 U9.24 | length 566.7
  Top Layer w5.12: U9.24@-516.73,68.4 -516.73,105.77 -229,393.5 v2(-120,393.5)
  Bottom Layer w5.12: v2@-119.5,392.5 -110.53,383.53 FPGA1.F13@-109.77,383.53
DIN6: FPGA1.E14 U9.26 | length 640.5
  Top Layer w5.12: U9.26@-542.32,23.13 v2(-520.13,23.13) ; v2(-534,78.5) -534,110.5 v2(-253,391.5)
  Bottom Layer w5.12: v2@-533.5,78 -533.5,53.5 -520.13,40.13 v2(-520.13,23.13) ; v2@-253.21,391.71 -241.71,403.21 FPGA1.E14@-129.45,403.21
DIN7: FPGA1.E13 U9.27 | length 799.3
  Top Layer w5.12: v2(-549,85) -549,110.88 -430.5,229.38 -430.5,384 -407.13,407.37 -260.63,407.37 -255,413 v2(-119.5,413) ; U9.27@-542.32,3.44 v2(-519.56,3.44)
  Bottom Layer w5.12: v2(-549,85) -549,32.89 v2(-519.56,3.44) ; v2@-118,411.5 -109.77,403.27 FPGA1.E13@-109.77,403.21
DIN8: FPGA1.D14 U9.29 | length 839.8
  Top Layer w5.12: v2(-562.5,96.5) -562.5,113.5 -442.5,233.5 -442.5,387.5 -409.5,420.5 v2(-268.5,420.5) ; U9.29@-542.32,-35.93 v2@-520.07,-35.93
  Bottom Layer w5.12: v2(-562.5,96.5) -562.5,6.5 v2(-520,-36) ; v2@-268.5,422.9 FPGA1.D14@-129.45,422.9
DIN9: FPGA1.D13 T_D9.0 U9.30 | length 1129.1
  Top Layer w5.12: T_D9.0@-733.71,0.46 -733.71,12.62 -617.49,128.84 -596.34,128.84 v2(-575.5,108) -575.5,115.5 -454.5,236.5 -454.5,391.5 -413.5,432.5 v2(-120,432.5) ; U9.30@-542.32,-55.61 v2(-519.61,-55.61)
  Bottom Layer w5.12: v2@-575.5,103.5 -575.5,0.28 v2(-519.61,-55.61) ; v2@-118.5,430.5 -110.9,422.9 FPGA1.D13@-109.77,422.9
DIN10: FPGA1.C13 T_D10.0 U9.31 | length 1137.3
  Top Layer w5.12: T_D10.0@-721.54,91.5 -708.5,91.5 -647.86,152.14 v2(-562.89,152.14) ; v2@-562.42,151.67 -464.5,249.59 -464.5,397 -418.5,443 -147,443 -137.5,452.5 v2(-119.5,452.5) ; U9.31@-542.32,-75.3 v2@-519.7,-75.3
  Bottom Layer w5.12: v2@-562.92,151.19 -588,126.11 -588,-7 v2(-519.5,-75.5) ; v2@-117.5,451 -109.77,443.27 FPGA1.C13@-109.77,442.58
DIN11: FPGA1.C12 T_D11.0 U9.32 | length 1180.9
  Top Layer w5.12: T_D11.0@-715,175 v1(-560,175) -475.5,259.5 -475.5,402.5 -423.5,454.5 -154.5,454.5 -141.5,467.5 -115,467.5 v2(-100,452.5) ; U9.32@-542.32,-94.98 v2@-520.48,-94.98
  Bottom Layer w5.12: v1(-560,175) -600.5,134.5 -600.5,-14 v2(-520,-94.5) ; v2@-99.5,452 FPGA1.C12@-90.08,442.58
GCLK: FPGA1.F1 Q20.2 U4.3 | length 307.3
  Bottom Layer w10: FPGA1.F1@126.45,383.53 154.47,383.53 188,350 188,317.5 252.5,253 Q20.2@310.5,253 ; U4.3@310.49,187.37 Q20.2@310.49,237.51
GLOBALRESET: FPGA1.K1 J_RST.0 | length 549.1
  Top Layer w5.12: v1(170,320.5) 196.5,320.5 225.5,291.5 580.48,291.5 J_RST.0@634.6,345.62
  Bottom Layer w5.12: FPGA1.K1@126.45,304.79 144.79,304.79 160.5,320.5 v1(170,320.5)
GND: C1.1 C2.1 C3.1 C4.1 C5.1 C6.1 C7.1 C8.1 C9.1 C10.1 C11.1 C12.1 C13.1 C14.1 C15.1 C16.1 C17.1 C20.1 Flash1.4 FPGA1.A1 FPGA1.A14 FPGA1.C2 FPGA1.C3 FPGA1.C6 FPGA1.C7 FPGA1.D5 FPGA1.D6 FPGA1.D9 FPGA1.D10 FPGA1.E8 FPGA1.E11 FPGA1.F7 FPGA1.F8 FPGA1.G4 FPGA1.G5 FPGA1.G6 FPGA1.G7 FPGA1.G8 FPGA1.H4 FPGA1.H7 FPGA1.H8 FPGA1.H9 FPGA1.H10 FPGA1.J7 FPGA1.J8 FPGA1.J10 FPGA1.K8 FPGA1.L3 FPGA1.L5 FPGA1.L6 FPGA1.L9 FPGA1.L10 FPGA1.L11 FPGA1.L12 FPGA1.M3 FPGA1.M7 FPGA1.M11 FPGA1.P1 FPGA1.P14 IMU1.11 IMU1.18 IMU1.20 J1.1 LD1.1 LD1.PAD LD2.1 LD2.PAD LD3.7 LD3.11 LD3.14 Q1.1 Q3.1 Q4.1 Q6.1 Q7.1 Q8.1 Q9.1 Q10.1 Q12.1 Q13.1 Q14.1 Q18.1 Q19.1 Q20.1 Q23.1 Q25.1 Q26.1 Q27.1 Q28.1 Q29.1 Q30.1 Q31.1 Q32.1 Q33.1 Q34.1 Q35.1 Q42.2 Q43.2 Q48.2 Q49.2 Q50.2 Q51.1 Q52.1 Q53.1 Q54.1 Q55.2 Q61.1 Q62.1 Q63.1 R3.2 R6.1 S1.48 T1.2 T_GND1.0 T_GND2.0 T_GND3.0 T_GND4.0 U1.8 U1.9 U2.8 U2.9 U4.2 U6.1 U7.6 U7.7 U7.13 U8.B5 U8.C1 U8.C2 U8.C5 U8.D5 U9.6 U9.7 U9.33 U10.4 Z2.1 Z13.1 Z17.1 Z19.2 Z20.2 Z21.2 Z22.2 | length 3229
  Top Layer w5.12: C14.1@-619.82,44.18 C14.1@-612.98,44.18 ; C6.1@-613.67,-16.5 C6.1@-613.48,-16.32 ; v1@-586,-418 v1@-585.84,-417.84 ; v1@-512,-497.5 -503.34,-488.84 LD3.14@-503.34,-467.06 ; R6.1@-427.31,-295.71 v1@-407.71,-295.71 ; U9.33@-418.31,-72.31 U9.33@-413,-67 ; U9.33@-399.5,-76.5 U9.33@-398.62,-77.38 ; C8.1@-270.55,-136.18 v1@-251.68,-136.18 ; v1@-250.5,18.5 v1(-249.5,18.5) ; C12.1@-227.5,-76 -205,-76 v1@-193.78,-64.78 ; C4.1@-185.68,-258.17 v1@-172,-271.86 ; v1@-172.5,148.5 -156.69,148.5 Q23.1@-128.18,177.01 ; v1@-151.18,-629.18 v1@-151,-629 ; v1@-118,-183 -107.13,-193.87 U10.4@-107.13,-217.68 ; v1(-47,-261.5) v1@-46.65,-261.15 ; Q33.1@-31.5,-213.5 v1(-31,-213) ; Q53.1@-20.7,-493.26 Q53.1@-9.74,-493.26 ; LD1.1@14,-603.57 LD1.1@14.71,-604.29 ; Q63.1@134.49,316.32 Q63.1@136.32,316.32 ; Q13.1@170.5,216.5 168.19,216.5 187.69,197 Q1.1@242,197 ; Q30.1@177.47,-147.47 Q30.1@177.47,-141.5 ; Q34.1@252,-221.5 Q34.1@253,-220.5 ; C1.1@442.24,48.2 cw(c449.58,48.2) C1.1@444.39,53.39 ; v1@493.5,-172 v1@494.06,-171.44 ; v1@494,-211 v1@494.06,-210.94 ; v1(500.16,-277.66) IMU1.18@520.35,-277.66 ; v1(527,-327) 539.01,-314.99 IMU1.20@539.01,-311.6 ; Q29.1@538,-81.5 Q29.1@541.29,-78.21 ; U7.13@600.21,-78.21 U7.13@603.5,-81.5 ; IMU1.11@602.84,-216.97 605.81,-214 605.81,-209.19 612,-203 v1(612,-197.5) ; v1@664.27,70.23 Q28.1@664.27,93.8 ; U7.13@687,-78.5 687.79,-77.71 U7.7@722.3,-77.71
  Top Layer w10: v1(-633,31) C14.1@-619.82,44.18 ; v1@-631.82,-48.32 C5.1@-613.48,-48.32 ; v1(-631.5,-16) -631.5,-16.5 C6.1@-613.67,-16.5 ; v1(-628.5,91.7) C13.1@-612.98,76.18 ; v1@-585.84,-417.84 LD3.11@-552.56,-417.84 ; LD3.7@-503.34,-353.44 v1@-503.34,-323.16 ; U9.33@-440.81,-32.7 U9.33@-409.76,-63.76 ; U9.6@-418.31,-120.57 U9.33@-418.31,-72.31 ; v1@-406.18,-225.18 C20.1@-406.18,-206.99 ; v1@-401.13,-491.83 Q55.2@-401.13,-474.44 ; U9.7@-398.62,-120.57 U9.33@-398.62,-77.38 ; v1@-337.18,-223.54 C9.1@-337.18,-206.99 ; C7.1@-270.55,-168.18 v1@-256.18,-168.18 ; C10.1@-270.55,-104.18 C11.1@-270.55,-72.18 C12.1@-239.98,-72.18 ; C15.1@-270.55,63.82 v1@-250.68,63.82 ; C16.1@-264.5,32.5 v1@-250.5,18.5 ; v1(-221,-594) LD2.1@-221,-576 ; v1@-193.78,-64.78 R3.2@-193.78,-40.68 ; v1@-127.25,-325.49 C3.1@-127.25,-307.32 ; v1@-46.65,-261.15 Q33.1@-46.65,-220.5 ; Q18.1@-9.01,360.32 5,346.31 Q8.1@5,316.5 ; v1@-6,-604.79 LD1.1@15.21,-604.79 ; Q63.1@136.32,316.32 v1(150.5,330.5) ; Q62.1@146.99,393.32 v1(147,409.5) ; v1@148.8,353.7 Q12.1@173.74,353.7 ; v1(149,216.5) Q13.1@168.19,216.5 ; Q30.1@166.5,-120 v1(166.5,-104.5) ; v1@175.74,411.74 Q61.1@175.74,435.7 ; Q30.1@188,-121 v1@188,-105.5 ; Z2.1@231.4,318 v1(250,318) ; v1@418.29,249.71 Z17.1@418.29,272.32 ; v1@494.06,-210.94 Q48.2@494.06,-192.68 ; v1@494.06,-171.44 Q49.2@494.06,-153.68 ; v1(538,-95.5) Q29.1@538,-81.5 ; Q29.1@541.29,-78.21 U7.6@571.7,-78.21 U7.13@600.21,-78.21 ; Q50.2@640.82,-164.56 v1(656.44,-164.56) ; Q26.1@664.27,138.8 v1@682.97,157.5 ; Q27.1@664.27,183.8 v1@688.3,183.8 ; v1@694.82,-217.68 Z19.2@694.82,-201.22
  Top Layer w15: Q53.1@-9.74,-493.26 2,-505 Q54.1@20.5,-505
  Top Layer w20: Q52.1@-175.51,-629.18 v1@-151.18,-629.18 ; C2.1@441.24,102.2 473.3,102.2 v1(473.5,102) ; C1.1@444.39,53.39 v1@459,68
  Top Layer w30: Q31.1@412.65,-119 450,-119 ; 464.15,158.15 Q25.1@514,158.15 ; 505.65,-529 Q35.1@505.65,-474.5
  Bottom Layer w5.12: Q43.2@-361.5,420 -338.63,442.87 U2.8@-338.63,467.94 ; v1@-170.5,513.5 -154.5,497.5 -145,497.5 FPGA1.A14@-129.45,481.95 ; FPGA1.P14@-129.45,226.05 -128.95,226.05 v1(-119.5,235.5) ; v1(-116.5,30) -116.5,71.4 Z13.1@-58.71,129.18 ; FPGA1.L12@-90.08,285.1 FPGA1.L11@-70.4,285.1 -70.4,284.4 v1(-61,275) ; v1@-80,413 v1(-80,412.81) FPGA1.E11@-70.4,403.21 ; FPGA1.M11@-70.4,265.42 -61,274.82 v1(-61,275) ; FPGA1.J10@-51,324 -50.5,324 v1(-40.5,334) ; FPGA1.H10@-50.71,344.16 -40.56,334 v1(-40.5,334) ; FPGA1.D10@-50.71,422.9 -42,414.18 v1(-42,414.09) -39.83,414.09 FPGA1.D9@-31.03,422.9 ; FPGA1.L9@-31.03,285.1 FPGA1.L10@-50.71,285.1 -60.81,275 v1(-61,275) ; FPGA1.H9@-31.03,344.16 -31.03,344.47 v1(-21.5,354) ; FPGA1.H9@-30.5,344 v1(-40.5,334) ; FPGA1.K8@-11.34,304.79 -11.34,323.66 -11,324 8,324 FPGA1.J7@8.5,324.5 ; FPGA1.G8@-11.34,363.34 FPGA1.G8@-11.34,363.5 ; FPGA1.G8@-11.34,363.84 FPGA1.G8@-11.34,363.5 ; FPGA1.F8@-11.34,383.53 -11.34,384.16 v1@-3,392.5 ; FPGA1.E8@-11.34,403.21 -11.34,402.84 8.5,383 FPGA1.F7@8.5,382.5 ; FPGA1.J8@-10.5,325.5 -11.34,326.34 FPGA1.H8@-11.34,344.16 -11.66,344.16 v1(-21.5,354) ; FPGA1.H7@7.84,344.16 FPGA1.H7@8.34,344.16 ; FPGA1.M7@8.34,265.42 8.34,265.16 v1(18,255.5) ; FPGA1.C7@8.34,442.58 v1@18.76,453 ; FPGA1.H7@9,345 8.5,345.5 8.5,363 8,363.5 FPGA1.G8@-11.34,363.5 ; v1(17.5,451.5) 19.11,451.5 FPGA1.C6@28.03,442.58 37.5,433.11 v1(37.5,432.5) v1@38,432 ; FPGA1.L6@28.03,285.1 28.03,284.47 v1@36.5,276 ; FPGA1.G6@28.03,363.84 37.18,373 v1(38,373) 38.56,373 FPGA1.G5@47.71,363.84 ; FPGA1.D6@28.03,422.9 28.9,422.9 v1@38,432 ; v1(37.5,275.5) 38.11,275.5 FPGA1.L5@47.71,285.1 ; FPGA1.D5@48,423.5 46.5,423.5 v1@38,432 ; FPGA1.H4@67.4,344.16 76,352.76 v1@76,353.5 ; FPGA1.G4@67.4,363.84 76.5,354.74 v1(76.5,354) ; v1@76.87,354.37 v1@77.74,353.5 ; FPGA1.C3@87,442.5 FPGA1.C3@87.5,442.5 ; FPGA1.M3@87.08,265.42 87.6,265.42 v2(97.18,275) FPGA1.L3@87.08,285.1 ; FPGA1.C3@87.08,442.58 v1(96.5,452) 97.35,452 FPGA1.C2@106.77,442.58 ; FPGA1.P1@126.45,226.05 127.45,226.05 135,218.5 v1@149.5,218.5 ; FPGA1.A1@126.45,481.95 v1@163.11,445.3 ; U4.2@310.49,98.79 U4.2@310.49,105.49 ; v1@392.8,243.3 v1@393,243.5 ; v1@478.38,241.99 v1@480.98,244.59 ; Flash1.4@495.68,9.5 Flash1.4@517,9.5 ; U1.8@558.5,417 511,417 527.12,433.12 U1.9@559.56,433.12 ; v1(-21.5,354) -12,363.5 FPGA1.G8@-11.34,363.5
  Bottom Layer w8: v1(-355.5,516.5) -354,516.5 -338.63,501.13 ; U2.8@-338.63,467.94 -338.63,501.13 ; U2.9@-322.88,467.94 -322.88,485.38 -338.63,501.13
  Bottom Layer w10: v1(-299,396.5) -252.45,349.95 T1.2@-252.45,317.01 ; C17.1@-274.18,97.06 v1@-248.69,97.06 ; Q20.1@365.74,243.3 v1@392.8,243.3 ; v1(412.32,-405.68) Z22.2@440.28,-405.68 ; v1(448.5,19) 458,9.5 Flash1.4@495.68,9.5 ; Q14.1@461.82,241.99 v1@478.38,241.99 ; Q42.2@510.06,480.68 v1@510.06,501.94 ; Flash1.4@517,9.5 v1(531.5,-5) ; U6.1@595.1,88.6 v1@595.1,107.9
  Bottom Layer w30: U4.2@310.49,105.49 v1@358,153
  other v1: -144.5,-682 -144,-666 78,-665 59,-648 75.5,-648 92.5,-648 109,-648 126.5,-648 -159,-637.5 92.5,-631 109,-631 126.5,-631 -150.5,-624 -5.5,-604.5 496.5,-531.5 514.5,-531.5 -319.5,-520.5 -303,-520.5 -286,-520.5 -269.5,-520.5 -252,-520.5 497,-515 515,-515 20.18,-505.01 -319.5,-503.5 -303,-503.5 -286,-503.5 -269.5,-503.5 -252,-503.5 -510,-495.5 -400.99,-490.97 -17,-487.5 285.5,-471 301.5,-458.5 301.5,-442.5 -584.5,-417.5 116,-416 100.5,-411.5 299,-402.5 100,-395.5 299,-386 99.5,-379 115.5,-379 275.5,-370.5 293,-370.5 302,-356.5 302.5,-340.5 -126.95,-326.15 290.5,-326 -503.5,-320.5 -408.5,-295.5 -171,-272 -406.35,-225.26 -336.98,-224.95 694.5,-219.5 493.5,-210.5 -117,-184.5 493.5,-172.5 -254.5,-168 -252,-136.5 449.5,-127.5 433.5,-110.5 449.5,-110.5 188,-104.5 -418.5,-99 -399,-99 619.5,-77.5 -194.5,-65.5 620,-61 111.29,-56.71 129.5,-57 -632.5,-48.5 620,-44.5 449,41.5 449.5,58 -248.88,63.89 664,70.5 462.5,71.5 458.5,93.5 -250.22,96.71 595.5,108.5 459,113 -125.71,132.29 -107.5,132 355.5,137.5 -172.5,149 457.5,149 473.5,149.5 346,152.5 363,152.5 683.5,157.5 458,168 474,167.5 688.5,183.5 391,243.5 480.34,246.03 418.5,249 149,354 -2,393 77,394 175.5,412.5 513.5,418.5 -61,433 163.84,445.16 510,500 -172.5,516.5
  other v2: 0,209.5
  other v3: -495,17
GPO0: FPGA1.K13 U9.15 | length 417.1
  Top Layer w5.12: U9.15@-353.35,23.13 v2@-332.13,23.13 ; v2(-314.5,129.5) -316,129.5 -316.5,130 -313,130 -148,295 v2(-119,295)
  Bottom Layer w5.12: v2(-332,23) -316.5,38.5 -316.5,130 -316,129.5 v2(-314.5,129.5) ; v2@-118.5,296.5 -118.06,296.5 FPGA1.K13@-109.77,304.79
GPO1: FPGA1.H12 U9.16 | length 467.2
  Top Layer w5.12: U9.16@-353.35,42.81 -351.94,44.22 -298.04,44.22 -287.5,54.76 -287.5,87 -121.5,253 -111.5,253 -74.5,290 -74.5,299.47 -67,306.97 -67,321.5 v2(-80,334.5)
  Bottom Layer w5.12: FPGA1.H12@-90.08,344.16 -89.66,344.16 v2(-80,334.5)
GPO2: FPGA1.H11 U9.17 | length 579
  Top Layer w5.12: v2(-383,115.5) -378.94,111.44 U9.17@-378.94,68.4 ; v2(-60.5,334) -54.5,328 -54.5,309.5 -46.5,301.5 v2@-46.5,199 ; v2@-44.5,198 v2(-44.5,199)
  Bottom Layer w5.12: v2(-383,115.5) -383,125 -346,162 -103,162 -66,199 v2@-49,199 ; FPGA1.H11@-70.4,344.16 -60.5,334.26 v2(-60.5,334)
GPO3: FPGA1.H14 U9.18 | length 413.5
  Top Layer w5.12: U9.18@-398.62,68.4 -398.62,119.76 -191.38,327 v2(-190.5,327)
  Bottom Layer w5.12: v2(-190.5,327) -173.34,344.16 FPGA1.H14@-129.45,344.16
HS: FPGA1.J11 U9.1 | length 778
  Top Layer w5.12: v2(-516.73,-139.23) U9.1@-516.73,-120.57 ; v2(-340,62) -132.5,269.5 -110.62,269.5 -88.5,291.62 -88.5,305.5 v2(-79.5,314.5)
  Bottom Layer w5.12: v2(-516.73,-139.23) -516.73,-154.77 -505.5,-166 -429,-166 -359,-96 -359,43.5 -340.5,62 v2(-340,62) ; v2@-79,315 -70.4,323.6 FPGA1.J11@-70.4,324.47
IMU_SPI0: FPGA1.M2 IMU1.22 | length 861.1
  Top Layer w5.12: v1(116,275) 162,275 v1(167,270) ; v1@551,-343.33 IMU1.22@565.12,-329.21
  Bottom Layer w5.12: FPGA1.M2@106.77,265.42 v1@115.5,274.15 ; v1(167,270) 228,209 228,12 551,-311 v1(551,-346.66)
IMU_SPI1: FPGA1.M1 IMU1.23 | length 886.4
  Top Layer w5.12: v1(564.5,-363.5) 564.5,-351.7 IMU1.23@578.16,-338.03
  Bottom Layer w5.12: FPGA1.M1@126.45,265.42 146.92,265.42 214.5,197.83 214.5,9 452,-228.5 452,-299.5 521.5,-369 559,-369 v1(564.5,-363.5)
IMU_SPI2: FPGA1.L2 IMU1.24 | length 941.3
  Top Layer w5.12: v1(116,294.5) 166.5,294.5 v1(190.5,270.5) ; v1(587.5,-377.5) 587.5,-350.82 IMU1.24@590.67,-347.65
  Bottom Layer w5.12: FPGA1.L2@106.77,285.1 116,294.33 v1(116,294.5) ; v1(190.5,270.5) 242,219 242,17.5 587.5,-328 v1(587.5,-377.5)